# EAGLE board C12880 (EAGLE 7.7.0)
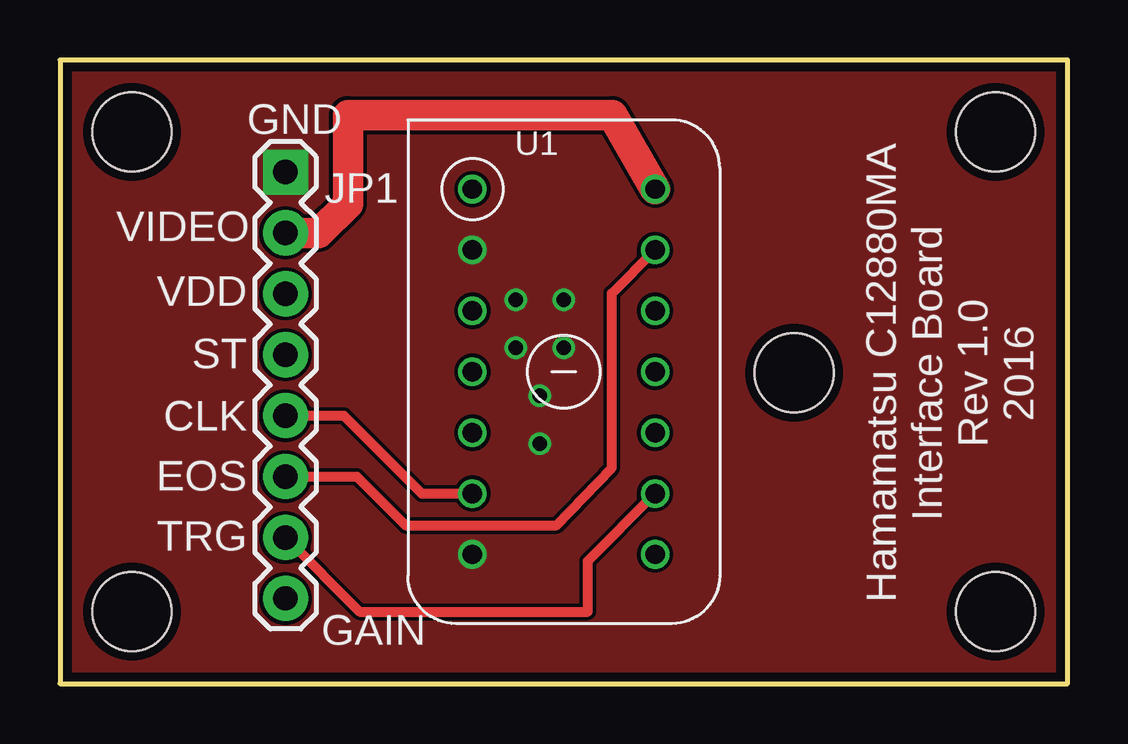
[diagram p0: board, top side]
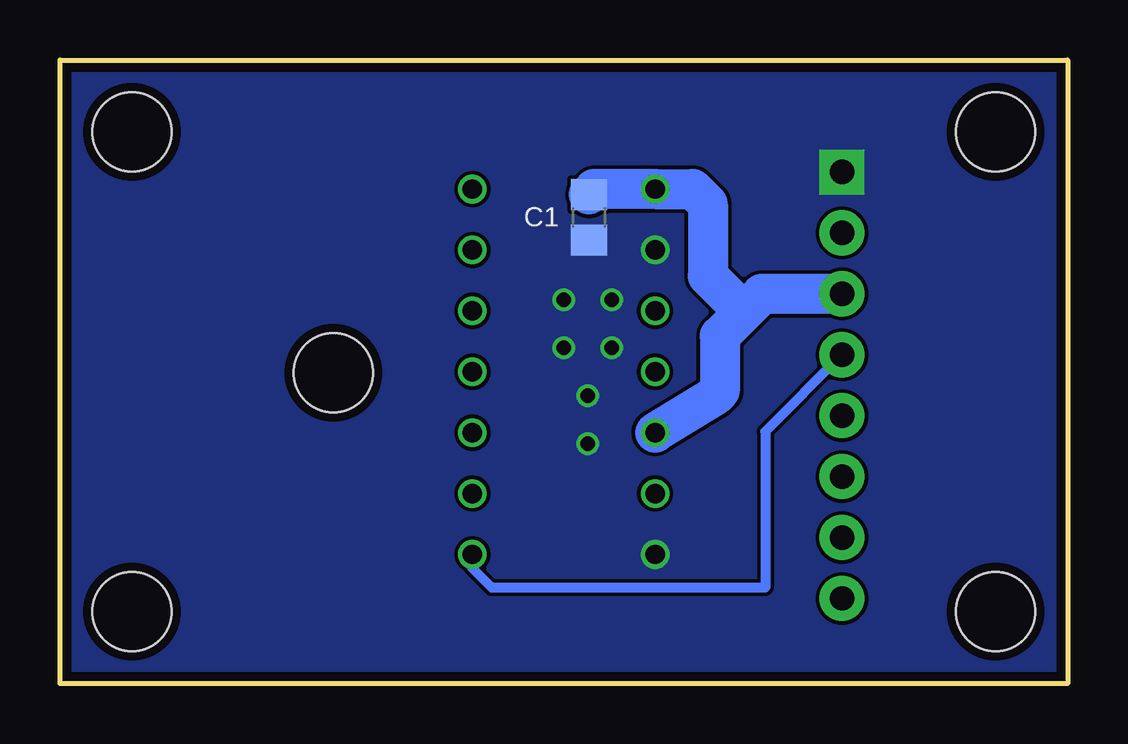
[diagram p1: board, bottom side, seen from below]

Size 42 x 26 mm. Coordinates in mm from the lower left corner, seen from the top.
Outline: 0,0 42,0 42,26 0,26 0,0
Copper layers (1*16): Top 0.0356mm / dielectric 1.5011mm / Bottom 0.0356mm
Design rules "oshpark-2layer": minimum track width 6mil, minimum drill 13mil, track to track 6mil, track to pad 6mil, pad to pad 6mil, via to via 6mil, smd to smd 6mil, copper to edge 15mil, drill to drill 6mil, minimum pad ring 7mil, minimum via ring 7mil, stop-mask expansion 2.5mil, vias tented up to drill 0mil, thermal gap 10mil

## Footprints (pad centres in the part's own frame; a part is rotated, then mirrored left to right if it is on the bottom)
C0805 = smd 1.3 x 1.5: 1 -0.95,0; 2 0.95,0
1X08 = drill 1.016 pad 1.88 square: 1 0,0 | drill 1.016 pad 1.88: 2 2.54,0; 3 5.08,0; 4 7.62,0; 5 10.16,0; 6 12.7,0; 7 15.24,0; 8 17.78,0
STAND-OFF = hole 3.302: 0,0
C12880MA = drill 0.8: 1 -7.62,-3.81; 2 -5.08,-3.81; 3 2.54,-3.81; 4 5.08,-3.81; 5 7.62,-3.81; 6 7.62,3.81; 7 5.08,3.81; 8 2.54,3.81; 9 -5.08,3.81; 10 -7.62,3.81; 11 -2.54,3.81; 12 0,3.81; 13 -2.54,-3.81; 14 0,-3.81

## Placement (x,y rotation side)
C1  0.1 uF  [C0805]  19.95,19.44 270 bottom
JP1  [1X08]  9.4,21.33 270 top
STANDOFF1  STAND-OFF  [STAND-OFF]  30.61,12.95 0 top
STANDOFF2  STAND-OFF  [STAND-OFF]  3,3 90 top
STANDOFF3  STAND-OFF  [STAND-OFF]  39,3 0 top
STANDOFF4  STAND-OFF  [STAND-OFF]  39,23 0 top
STANDOFF5  STAND-OFF  [STAND-OFF]  3,23 0 top
U1  MICROSPEC-C12880MA  [C12880MA]  21,13 270 top

## Library data of the parts
C1 STANDOFF1-STANDOFF5 = Spectron2
JP1 = Spectron2; PROD_ID: CONN-08438
U1 = C12880MA

## Nets
CLK: JP1.5 U1.4
EOS: JP1.6 U1.9
GAIN: JP1.8
GND: C1.2 JP1.1 U1.2 U1.5
ST: JP1.4 U1.6
TRG: JP1.7 U1.7
VDD: C1.1 JP1.3 U1.1 U1.3
VIDEO: JP1.2 U1.10

## Tracks (layer width: path | path; a pad name or v marks a point on that pad's centre or on a via)
CLK
  Top 0.406: JP1.5 11.83,11.17 15.08,7.92 U1.4
EOS
  Top 0.406: JP1.6 12.37,8.63 14.4,6.6 20.7,6.6 23,9 23,16.27 U1.9
GND  (via drill 0.6)
  other vias: 19,16 21,16 20,10 20,12 21,14 19,14
  pour Bottom (no thermals): 0.2,25.8 41.8,25.8 41.8,0.2 0.2,0.2
  pour Top (no thermals): 0.2,25.8 41.8,25.8 41.8,0.3 0.2,0.3
ST
  Bottom 0.406: JP1.4 12.6,10.51 12.6,4 24,4 24.81,4.81 U1.6
TRG
  Top 0.406: JP1.7 12.49,3 22,3 22,5.11 U1.7
VDD
  Bottom 1.676: JP1.3 12.75,16.25 13.5,15.5 | 13.5,15.5 14.5,14.5 14.5,12.2 14.7,12 U1.3 | 13.5,15.5 15,17 15,20 15.62,20.62 U1.1 19.72,20.62 C1.1
VIDEO
  Top 1.27: JP1.2 10.79,18.79 12,20 12,23.7 23.03,23.7 U1.10

## Text on the board
tPlace: GND | VIDEO | VDD | ST | Hamamatsu C12880MA / Interface Board / Rev 1.0 / 2016 | CLK | EOS | TRG | GAIN